# Altium PCB PCB1.PcbDoc
Units mil, origin at the board's own origin, x right, y up, seen from the top; angles counter-clockwise.
Board outline 580 x 1405 mil, 2 copper layers (Top Layer, Bottom Layer); 12 components, 8 nets, 38 pads, 2 vias.
Unrouted connection lines stored in the file: 2.
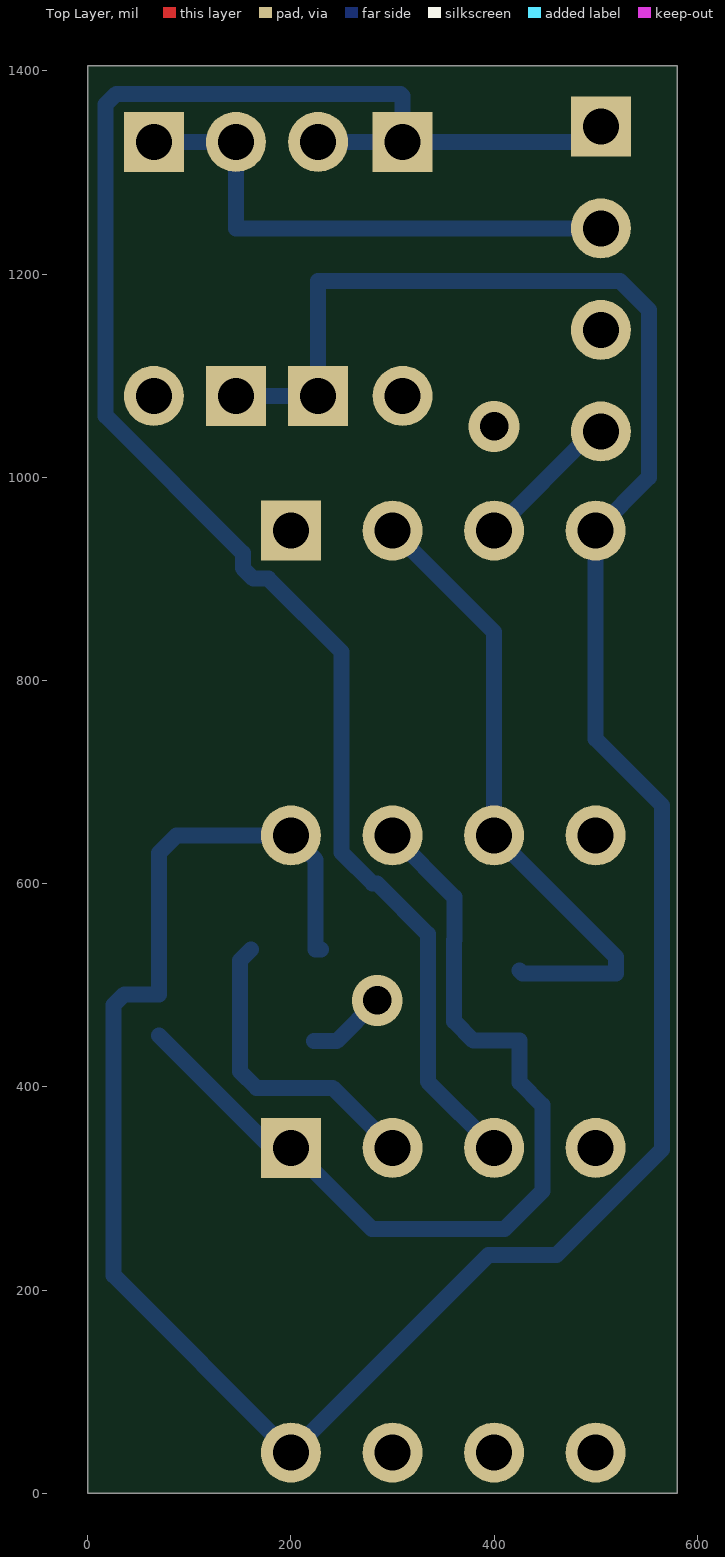
[diagram p0: Top Layer view]
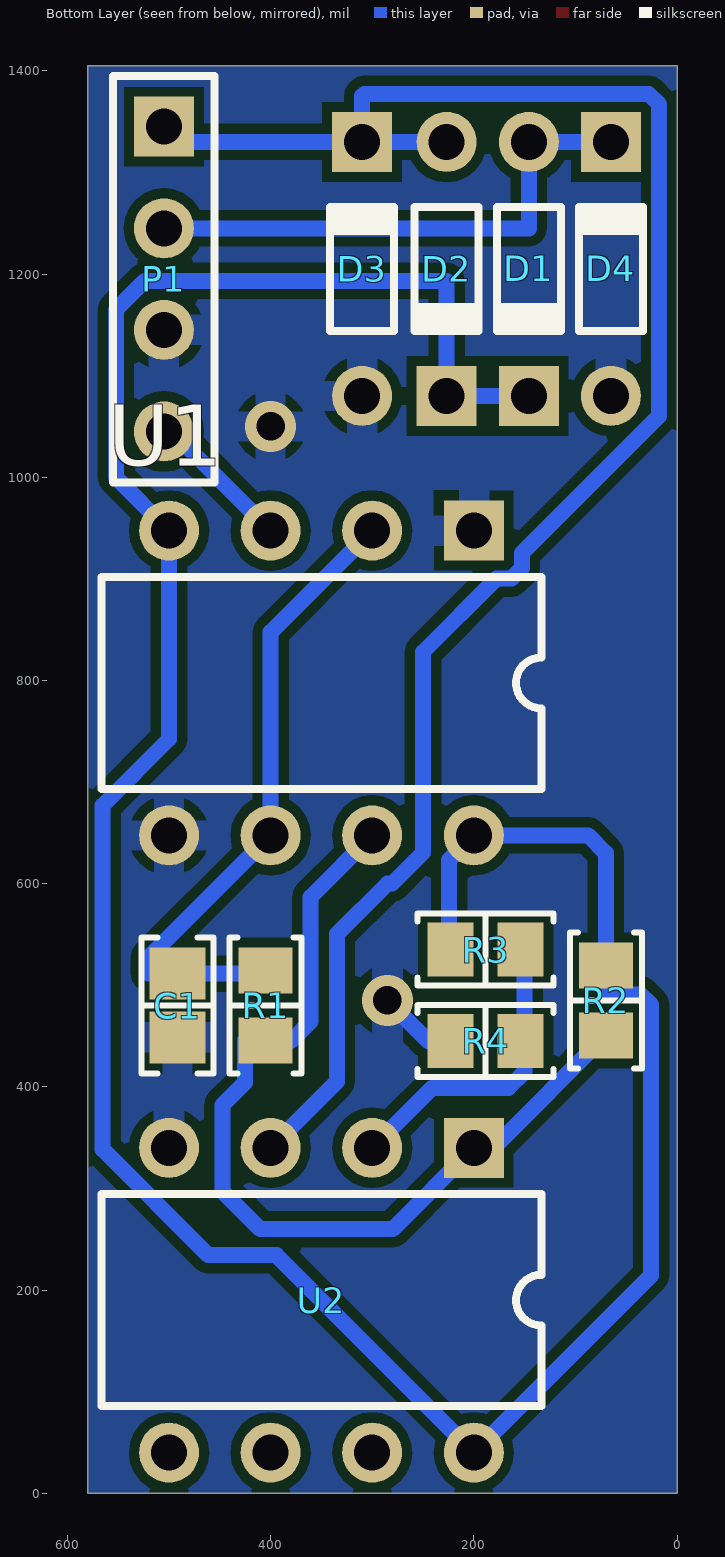
[diagram p1: Bottom Layer view, seen from below]

## Layer stack, top to bottom
Top Solder: solder mask 0.4, Solder Resist, Dk 3.5
Top Layer: signal copper 1.4
Dielectric 1: dielectric 12.6, FR-4, Dk 4.8
Bottom Layer: signal copper 1.4
Bottom Solder: solder mask 0.4, Solder Resist, Dk 3.5

## Board outline
0,0 580,0 580,1405 0,1405

## Design rules (kind name [scope] priority, off if disabled: settings)
Clearance [All] p1: gap=10
PlaneConnect [All] p1: planeconnectstyle=Relief reliefexpansion=20 reliefentries=4 reliefconductorwidth=30 reliefairgap=10
PolygonConnect [All] p1: connectstyle=Relief reliefconductorwidth=30 reliefentries=4 polygonreliefangle="90 Angle" airgapwidth=10
RoomDefinition Sheet1 [InComponentClass('Sheet1')] p1: confinementstyle=ConfineIn formatcopy=TRUE lockcomponents=FALSE outline 575,0 575,1400 5,1400 5,0
RoutingVias [All] p1: holewidth=28 width=50 viastyle="Through Hole" minholewidth=28 minwidth=50 maxholewidth=28 maxwidth=50
SolderMaskExpansion [All] p1: expansion=4
Width [All] p1: maxlimit=19.68 minlimit=11.81 preferedwidth=15.75
29 further rules are at their usual default settings.

## Components (designator, comment, footprint, x,y, rotation, side; value= is the part's Value field where it differs from the comment)
C1 "1uF" "CAP 0805/2012" 491.78,480 r90 bottom
D1 "BAT85" SOD68 145.88,1205 r270 bottom
D2 "BAT85" SOD68 226.75,1205 r270 bottom
D3 "BAT85" SOD68 310,1205 r90 bottom
D4 "BAT85" SOD68 65,1205 r90 bottom
P1 "Header 4" HDR1X4 505,1345 r270 bottom
R1 "220K" "RES 0805/2012" 405,480 r90 bottom
R2 "100K" "RES 0805/2012" 70,485 r270 bottom
R3 "10K" "RES 0805/2012" 188.28,535 r0 bottom
R4 "10K" "RES 0805/2012" 188.28,445 r180 bottom
U1 "NE555P" P008 350,797.53 r0 bottom
U2 "LM393P" P008 350,190 r0 bottom

## Footprints (in the part's own frame and the unit in brackets; to place one, negate y for a bottom-side part, rotate by r counter-clockwise, add the part's x,y. Pads: shape width x height; smd on the part's side, far side on the other; paste and mask are expansions set on the pad)
"CAP 0805/2012" [mm] "Chip Capacitor, 2-Leads, Body 2.00x1.20mm, IPC Medium Density"
  rect 1.3x1.4 smd: 1(-0.8,0) 2(0.8,0)
  silkscreen extent -1.7,-0.9 1.7,0.9, body extent -1,-0.64 1,0.64, height 1.26
HDR1X4 [mm] "Connector; Header; 4 Position"
  rect 1.5x1.5 hole 0.9: 1(0,0)
  round 1.5 hole 0.9: 2(2.54,0) 3(5.08,0) 4(7.62,0)
  silkscreen extent -1.27,-1.27 8.89,1.27
P008 [mm] "DIP; 8 Leads; Row Spacing 7.62 mm; Pitch 2.54 mm"
  rect 1.5x1.5 hole 0.9: 1(-3.81,-3.81)
  round 1.5 hole 0.9: 2(-1.27,-3.81) 3(1.27,-3.81) 4(3.81,-3.81) 5(3.81,3.81) 6(1.27,3.81) 7(-1.27,3.81) 8(-3.81,3.81)
  silkscreen extent -5.5,-2.65 5.5,2.65
"RES 0805/2012" [mm] "Chip Resistor, 2-Leads, Body 2.00x1.25mm, IPC Medium Density"
  rect 1.15x1.35 smd: 1(-0.875,0) 2(0.875,0)
  silkscreen extent -1.7,-0.9 1.7,0.9, body extent -0.95,-0.62 1.05,0.63, height 0.6
SOD68 [mm] "Diode, Axial; Body 3 x 1.6 mm (LxDia. max), Lead Dia. 0.55 mm (max)"
  round 1.5 hole 0.9: 1(-3.175,0)
  rect 1.5x1.5 hole 0.9: 2(3.175,0)
  silkscreen extent -1.55,-0.8 1.65,0.8

## Part data
C1: library part CC0805KRX7R9BB103, "CAP CER 10000PF 50V X7R 0805"
D1 D2 D3 D4: "Schottky Barrier Diode"
P1: "Header, 4-Pin"
R1 R2 R3 R4: library part ERJ-6ENF49R9V, "RES SMD 49.9 OHM 1% 1/8W 0805"
U1: "Precision Timer"
U2: "Dual Differential Comparator"

## Via types
v1: diameter 50, hole 28, Top Layer to Bottom Layer, 2 vias

## Nets (pads, with @x,y where several pads share a name; then routed paths per layer and width w, separated by ;. In a path a pad name is that pad's centre, name@x,y a point inside that pad or via, vN(x,y) a via of type N, cw(c..) or ccw(c..) an arc to the next point about the centre after c; other vN are vias at no path point)
GND: D2.1 D3.2 P1.1 U2.3 | length 1823.8
  Bottom Layer w15.75: D2.1 D3.2 ; U2.3 334.8,405.2 334.8,550.2 284.88,600.12 280.37,600.12 250,630.49 250,827.96 177.84,900.12 163.07,900.12 152.6,910.59 152.6,925.37 17.6,1060.37 17.6,1366.93 28.07,1377.4 307.6,1377.4 310,1375 D3.2 ; P1.1 490,1330 D3.2
GND_REC: C1.1 D3.1 D4.1 P1.3 R4.1 U1.1 U1.5 U2.4 | length 78.8
  Bottom Layer w15.75: R4.1 245,445 v1(285,485)
  other v1: 400,1050
NetC1_2: C1.2 R1.2 U1.2 U1.6 | length 623.4
  Bottom Layer w15.75: U1.2 400,847.53 U1.6 520,527.53 520,511.5 427.95,511.5 R1.2@425,514.45
NetP1_4: P1.4 U1.3 | length 145.4
  Bottom Layer w15.75: U1.3 497.47,1045 P1.4
NetR1_1: R1.1 R2.2 U1.7 U2.1 | length 909.8
  Bottom Layer w15.75: R2.2 180.55,340 U2.1 280,260 410,260 447.4,297.4 447.4,382.04 425,404.44 425,445.55 379.45,445.55 360.55,464.45 360.55,544.49 360.75,544.69 360.75,586.78 U1.7
NetR3_1: R3.1 R4.2 U2.2 | length 319.9
  Bottom Layer w15.75: R3.1@160.55,535 150,524.45 150,415 166.1,398.9 241.1,398.9 U2.2 U2.2@285.55,340
VCC: D1.1 D4.2 P1.2 | length 525
  Bottom Layer w15.75: D4.2 D1.1 145.88,1245 P1.2
VCC_REC: D1.2 D2.2 R2.1 R3.2 U1.4 U1.8 U2.8 | length 2861.3
  Bottom Layer w15.75: D1.2 D2.2 226.75,1193.25 523.79,1193.25 552.4,1164.63 552.4,999.93 U1.4 500,742.33 565.43,676.9 565.43,338.4 461.29,234.25 394.25,234.25 U2.8 25.55,214.45 25.55,480.59 36.02,491.06 70,491.06 R2.1 70,630 87.53,647.53 U1.8 224.25,623.27 224.25,535 R3.2@229.45,535
pads on no net: U2.5 U2.6 U2.7

## Polygon pours and split planes (outlines as drawn)
GND_REC on Bottom Layer "Bottom Layer-No Net" (solid, pour order 38): 0,0 580,0 580,1405 0,1405